# Altium PCB IWatch_DISP.PcbDoc
Units mm, origin at the board's own origin, x right, y up, seen from the top; angles counter-clockwise.
Board outline 35.13 x 30.19 mm, 2 copper layers (Top Layer, Bottom Layer); 25 components, 30 nets, 111 pads, 55 vias.
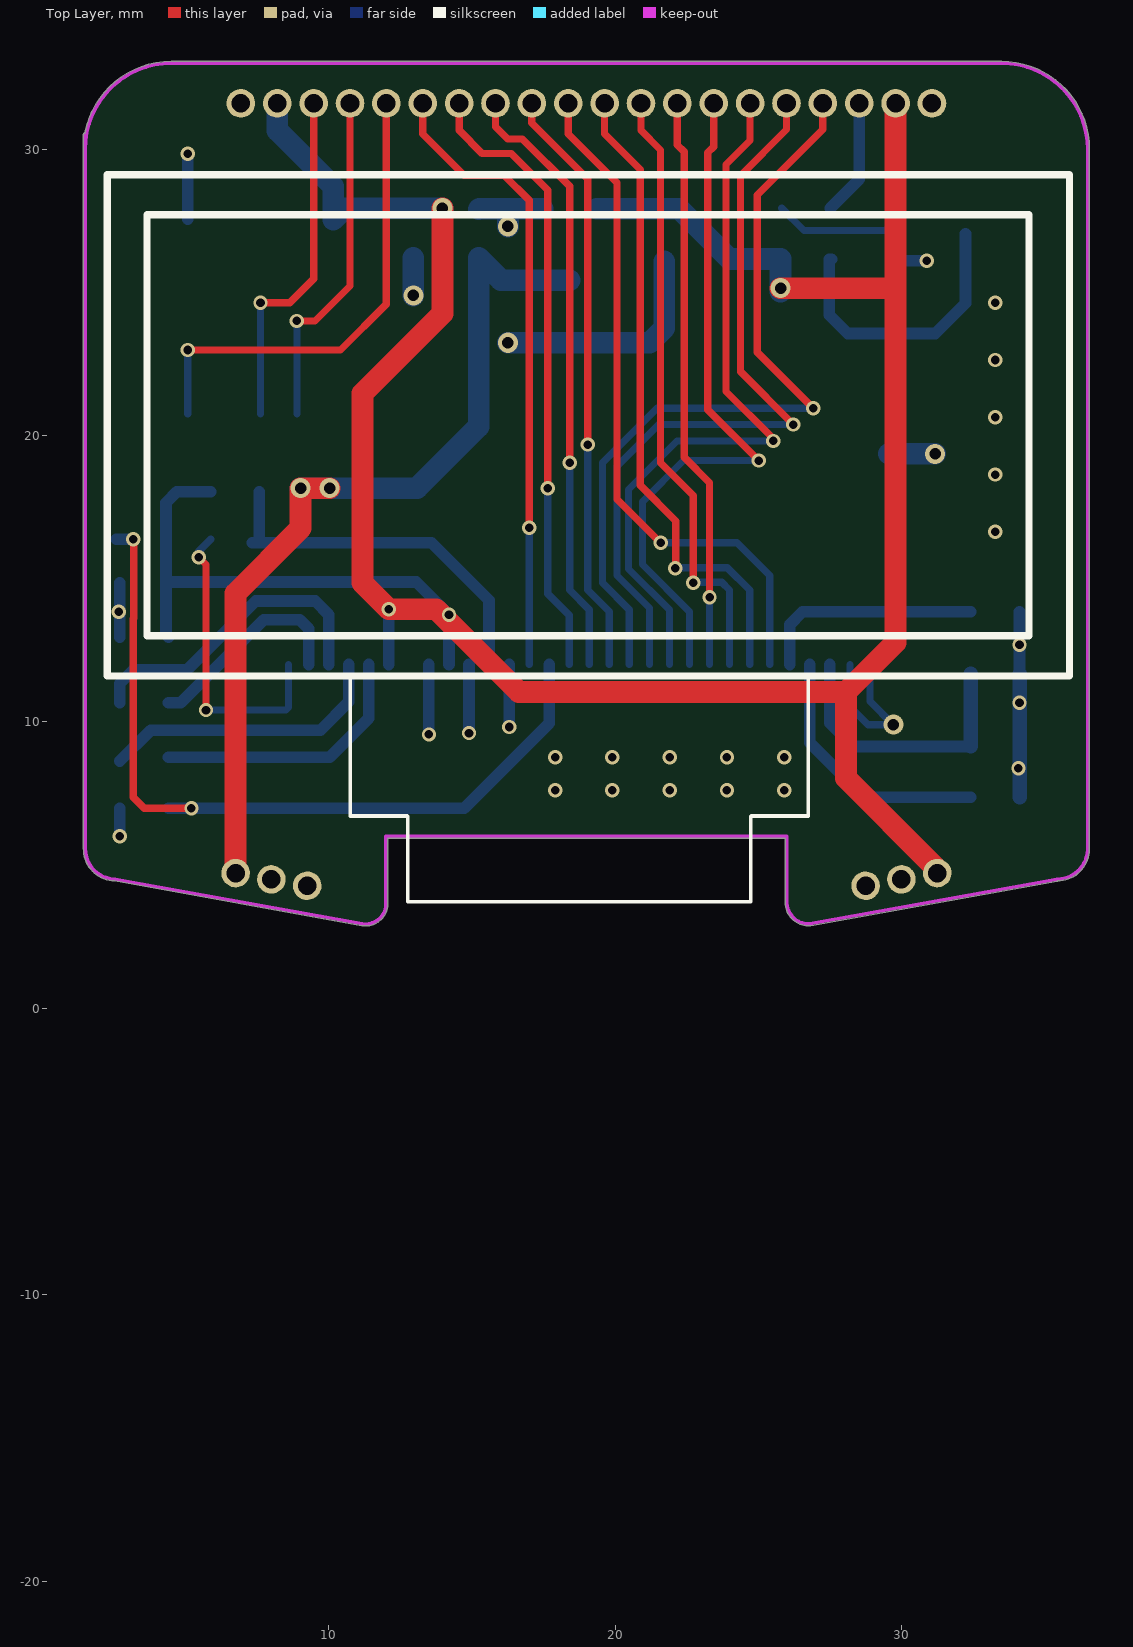
[diagram p0: Top Layer view]
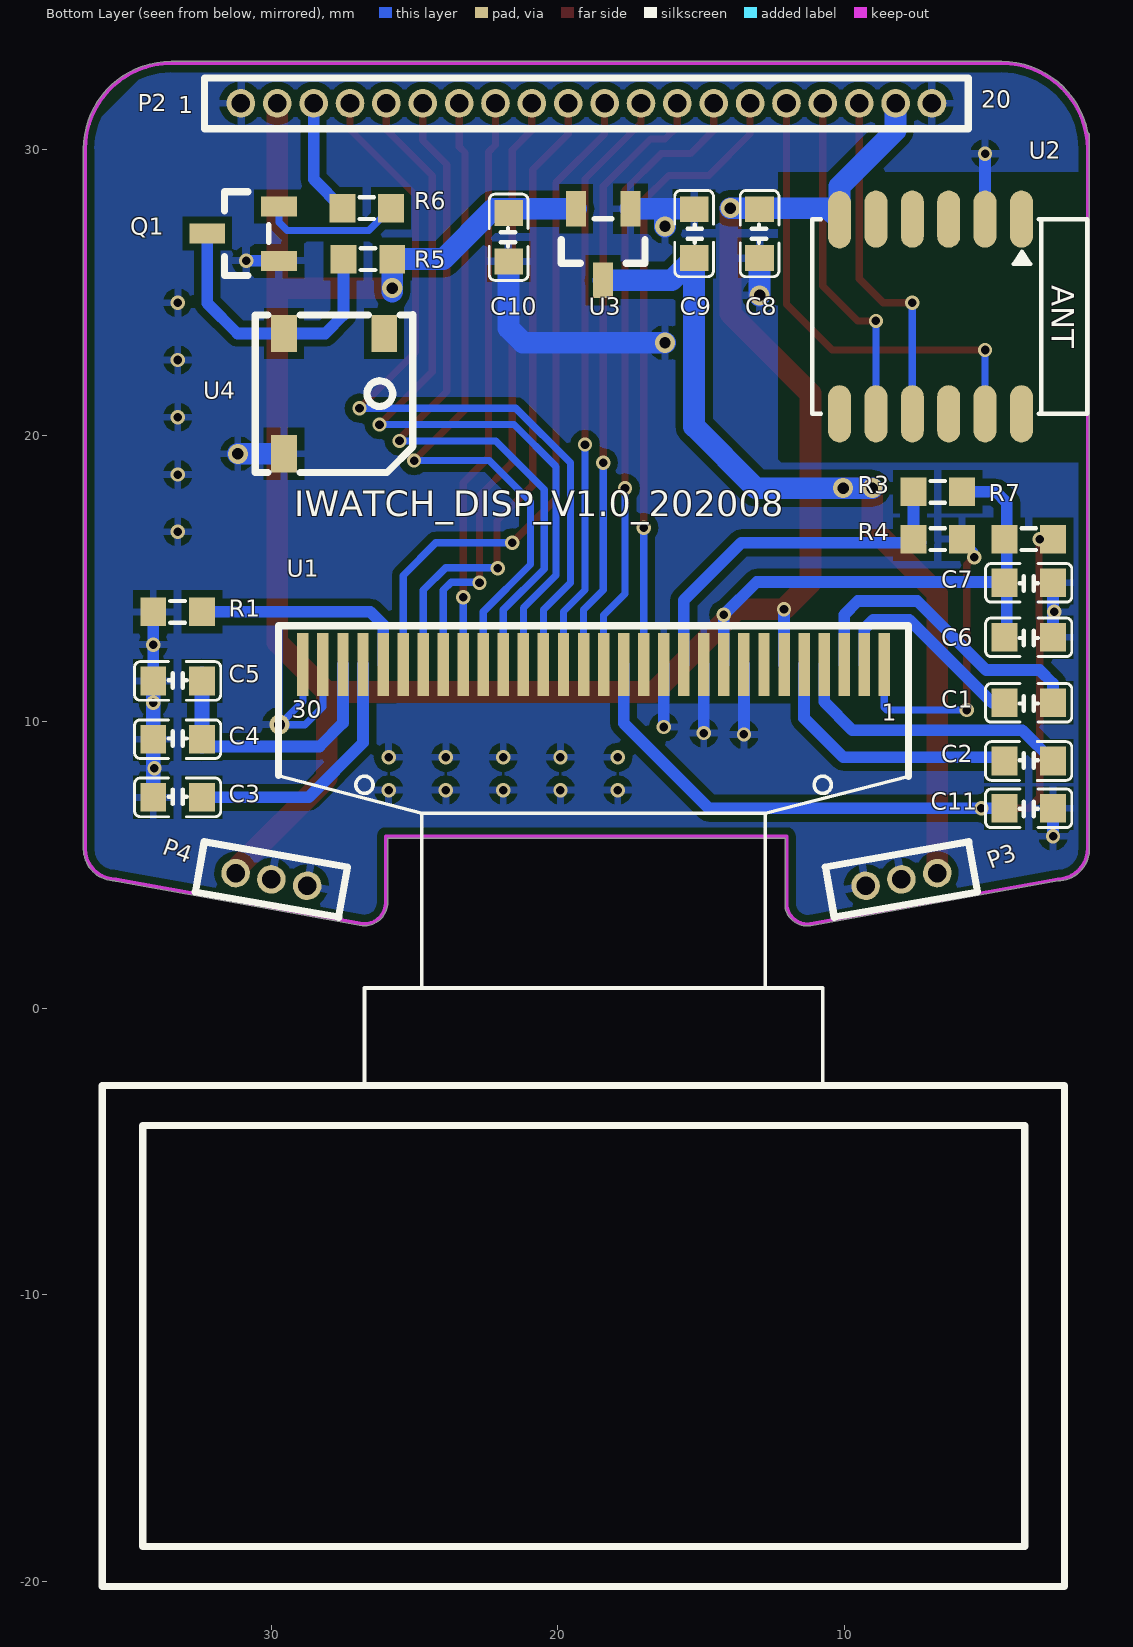
[diagram p1: Bottom Layer view, seen from below]

## Layer stack, top to bottom
Top Solder: solder mask 0.0102, Solder Resist, Dk 3.5
Top Layer: signal copper 0.0356
Dielectric 1: dielectric 0.32, FR-4, Dk 4.8
Bottom Layer: signal copper 0.0356
Bottom Solder: solder mask 0.0102, Solder Resist, Dk 3.5

## Board outline
11.162,2.887 ccw(c11.176,2.949) 11.166,2.886 ccw(c11.285,3.665) 12.063,3.546 ccw(c12,3.556) 12.064,3.556 12.064,5.936 25.936,5.936 25.936,3.683 ccw(c26,3.683) 25.936,3.681 ccw(c26.768,3.712) 26.799,2.88 ccw(c26.797,2.944) 26.83,2.89 35.436,4.443 ccw(c35.425,4.505) 35.453,4.448 ccw(c35.442,5.57) 36.564,5.551 ccw(c36.5,5.552) 36.564,5.552 36.564,30 ccw(c33.5,30) 33.5,33.064 4.5,33.064 ccw(c4.5,30) 1.488,30.563 ccw(c1.5,30.5) 1.436,30.5 1.436,5.589 ccw(c2.558,5.57) 2.534,4.448

## Design rules (kind name [scope] priority, off if disabled: settings)
Clearance [All] p1: gap=0.152 ignorepadtopadclearanceinfootprint=FALSE except(0: Arc-Hole Track-Hole SMDPad-Hole THPad-Hole Via-Hole Fill-Hole Poly-Hole Region-Hole Text-Hole; 0.254: Arc-Poly Arc-Region Track-Poly Track-Region SMDPad-Poly SMDPad-Region THPad-Poly THPad-Region Via-Poly Via-Region Fill-Poly Fill-Region Poly-Poly Poly-Region Region-Region)
MinimumSolderMaskSliver [All] p1 off: minsoldermaskwidth=0.254
NetAntennae [All] p1 off: netantennaetolerance=0
PolygonConnect [All] p1: connectstyle=Relief reliefconductorwidth=0.254 reliefentries=4 polygonreliefangle="90 Angle" airgapwidth=0.254
RoutingVias [All] p1: holewidth=0.711 width=1.27 viastyle="Through Hole" minholewidth=0.711 minwidth=1.27 maxholewidth=0.711 maxwidth=1.27
SilkToSilkClearance [All] p1 off: silktosilkclearance=0.254
SilkToSolderMaskClearance [IsPad] p1 off: minsilkscreentomaskgap=0.254 clearancetoexposedcopper=TRUE
SolderMaskExpansion [All] p1: expansion=0.102
Width [All] p1: maxlimit=1.27 minlimit=0.254 preferedwidth=0.254 minimp=50.000000 maximp=50.000000 favimp=50.000000
26 further rules are at their usual default settings.

## Components (designator, comment, footprint, x,y, rotation, side; value= is the part's Value field where it differs from the comment)
C1 "1uF" C0603 3.556,10.668 r0 bottom
C2 "1uF" C0603 3.556,8.636 r180 bottom
C3 "2.2uF" C0603 33.274,7.366 r180 bottom
C4 "2.2uF" C0603 33.274,9.398 r180 bottom
C5 "1uF" C0603 33.274,11.43 r180 bottom
C6 "2.2uF" C0603 3.556,12.954 r0 bottom
C7 "1uF" C0603 3.556,14.859 r0 bottom
C8 "0.1uF" C0603 12.954,27.051 r90 bottom
C9 "10uF" C0603 15.24,27.051 r270 bottom
C10 "10uF" C0603 21.717,26.924 r90 bottom
C11 "0.1uF" C0603 3.556,6.985 r0 bottom
P2 "Header 20" HDR_1X20P_1.27MM 19,31.6 r180 bottom locked
P3 "Header 3" HDR_1X3P_1.27MM 8,4.5 r170 bottom locked
P4 "Header 3" HDR_1X3P_1.27MM 30,4.5 r10 bottom
Q1 "2N3904" SOT23-3 30.988,27.051 r180 bottom
R1 "560k" R0603 33.274,13.843 r180 bottom
R3 "4.7k" R0603 6.731,18.034 r180 bottom
R4 "4.7k" R0603 6.731,16.383 r0 bottom
R5 "10k" R0603 26.631,26.162 r0 bottom
R6 "10k" R0603 26.67,27.94 r0 bottom
R7 "4.7k" R0603 3.556,16.383 r180 bottom
U1 "OLED 1.3'_30P" "OLED 1.3'_30P" 18.75,9.906 r180 bottom locked
U2 "PW02" PW02 3.81,27.559 r270 bottom
U3 "SC662K-3.2" SOT23-3 18.415,26.67 r90 bottom
U4 "Buzzer" Buzzer_5.5x2.5mm 27.813,21.463 r270 bottom

## Footprints (in the part's own frame and the unit in brackets; to place one, negate y for a bottom-side part, rotate by r counter-clockwise, add the part's x,y. Pads: shape width x height; smd on the part's side, far side on the other; paste and mask are expansions set on the pad)
Buzzer_5.5x2.5mm [mm]
  rect 1.3x0.9 smd: 1(-2.1,-1.75) 2(2.1,-1.75) 3(-2.1,1.75)
  silkscreen extent -2.75,-2.75 2.75,2.75
C0603 [mm]
  rect 0.9x1 smd: 1(-0.85,0) 2(0.85,0)
  silkscreen extent -1.51,-0.67 1.51,0.67, body extent -1.03,-0.51 0.94,0.51, height 0.5
HDR_1X3P_1.27MM [mm]
  round 1 hole 0.65: 1(-1.27,0) 2(0,0) 3(1.27,0)
  silkscreen extent -2.54,-0.89 2.54,0.89
HDR_1X20P_1.27MM [mm]
  round 1 hole 0.65: 1(-12.065,0) 2(-10.795,0) 3(-9.525,0) 4(-8.255,0) 5(-6.985,0) 6(-5.715,0) 7(-4.445,0) 8(-3.175,0) 9(-1.905,0) 10(-0.635,0) 11(0.635,0) 12(1.905,0) 13(3.175,0) 14(4.445,0) 15(5.715,0) 16(6.985,0) 17(8.255,0) 18(9.525,0) 19(10.795,0) 20(12.065,0)
  silkscreen extent -13.33,-0.89 13.33,0.89
"OLED 1.3'_30P" [mm]
  rect 0.4x2.2 smd: 1(10.151,2.101) 2(9.451,2.101) 3(8.75,2.1) 4(8.05,2.1) 5(7.35,2.1) 6(6.65,2.1) 7(5.95,2.1) 8(5.25,2.1) 9(4.55,2.1) 10(3.85,2.1) 11(3.15,2.1) 12(2.45,2.1) 13(1.75,2.1) 14(1.05,2.1) 15(0.349,2.1) 16(-0.35,2.1) 17(-1.05,2.1) 18(-1.75,2.1) 19(-2.451,2.101) 20(-3.15,2.1) 21(-3.851,2.099) 22(-4.55,2.1) 23(-5.249,2.1) 24(-5.95,2.1) 25(-6.65,2.101) 26(-7.35,2.1) 27(-8.051,2.101) 28(-8.75,2.1) 29(-9.451,2.1) 30(-10.15,2.1)
  silkscreen extent -17.16,-30.1 16.44,3.45, body extent -17.21,-6.19 16.39,19.27, height 0.2
PW02 [mm] "BLE"
  oval 2x0.8 smd: 1(0,0) 2(0,-1.27) 3(0,-2.54) 4(0,-3.81) 5(0,-5.08) 6(0.025,-6.35) 7(6.8,-6.35) 8(6.8,-5.08) 9(6.8,-3.81) 10(6.8,-2.54) 11(6.8,-1.27) 12(6.8,0)
  silkscreen extent 0,-7.3 6.8,2.3
R0603 [mm]
  rect 0.9x1 smd: 1(-0.85,0) 2(0.85,0)
  silkscreen extent -0.25,-0.38 0.25,0.38, body extent -1.03,-0.51 0.94,0.51, height 0.5
SOT23-3 [mm]
  rect 1.25x0.7 smd: 1(1.25,-0.95) 2(1.25,0.95) 3(-1.25,0)
  silkscreen extent -0.65,-1.46 0.9,1.46

## Part data
C1 C2 C3 C4 C5 C6 C7 C8 C9 C10 C11: library part C
P2: "Header, 20-Pin", LatestRevisionDate=17-Jul-2002, LatestRevisionNote="Re-released for DXP Platform.", Publisher="Altium Limited"
P3 P4: "Header, 3-Pin", LatestRevisionDate=17-Jul-2002, LatestRevisionNote="Re-released for DXP Platform.", Publisher="Altium Limited"
Q1: "NPN General Purpose Amplifier", ComponentLink1Description="Manufacturer Link", ComponentLink1URL=http://www.fairchildsemi.com/, ComponentLink2Description=Datasheet, ComponentLink2URL=http://www.fairchildsemi.com/ds/2N%2F2N3904.pdf, DatasheetVersion=1997, LatestRevisionDate=15-Jan-2003, LatestRevisionNote="PCB Footprint 'BCY-W3/D4.7' replaced", PackageDescription="TO, Flat Index; 3 In-Line, Axial Leads; Body Dia. 4.5mm; Leads 0.51 x 0.48 mm (max)", PackageReference=TO-92A, PackageVersion=Sep-1998, Published=8-Jun-2000, Publisher="Altium Limited"
R1 R3 R4 R5 R6 R7: library part R
U1: "1.3寸oled显示屏12864 分辨率 驱动芯片ssd1315兼容ssd1306"
U2: "PW02 蓝牙模块 蓝牙5.0 串口透传,DA14585芯片"
U3: "Low Dropout,  250mA"

## Via types
v1: diameter 0.5, hole 0.3, Top Layer to Bottom Layer, tented both sides, 46 vias
v2: diameter 0.7, hole 0.4, Top Layer to Bottom Layer, tented both sides, 9 vias

## Nets (pads, with @x,y where several pads share a name; then routed paths per layer and width w, separated by ;. In a path a pad name is that pad's centre, name@x,y a point inside that pad or via, vN(x,y) a via of type N, cw(c..) or ccw(c..) an arc to the next point about the centre after c; other vN are vias at no path point)
BLE_RX: P2.17 U2.8 | length 12
  Top Layer w0.254: v1(8.89,24.003) 9.525,24.003 10.745,25.223 P2.17
  Bottom Layer w0.254: U2.8 v1(8.89,24.003)
BLE_SLEEP: P2.18 U2.9 | length 12.2
  Top Layer w0.254: v1(7.62,24.638) 8.636,24.638 9.475,25.477 P2.18
  Bottom Layer w0.254: U2.9 v1(7.62,24.638)
BLE_TX: P2.16 U2.11 | length 16.8
  Top Layer w0.254: v1(5.08,22.987) 10.414,22.987 12.015,24.588 P2.16
  Bottom Layer w0.254: U2.11 v1(5.08,22.987)
BS1: R3.1 R4.2 U1.11 | length 13
  Bottom Layer w0.406: R4.2@7.327,16.256 13.589,16.256 15.6,14.245 U1.11 ; R4.2 R3.1
BZR: P2.3 R6.2 | length 4.1
  Bottom Layer w0.406: R6.2 28.525,28.945 P2.3
D0: P2.4 U1.18 | length 28
  Top Layer w0.254: v1(26.924,20.955) 24.969,22.91 24.969,28.398 27.255,30.684 P2.4
  Bottom Layer w0.254: U1.18 20.5,13.917 19.558,14.859 19.558,19.05 21.463,20.955 v1(26.924,20.955)
D1: P2.5 U1.19 | length 26.8
  Top Layer w0.254: P2.5 25.985,30.684 24.384,29.083 24.384,22.225 v1(26.226,20.383)
  Bottom Layer w0.254: U1.19 21.201,13.978 20.066,15.113 20.066,18.923 21.526,20.383 v1(26.226,20.383)
D2: P2.6 U1.20 | length 25.1
  Top Layer w0.254: P2.6 24.715,30.303 23.876,29.464 23.876,21.54 v1@25.477,19.939
  Bottom Layer w0.254: U1.20 21.9,13.914 20.472,15.342 20.472,18.12 22.165,19.812 v1(25.527,19.812)
D3: P2.7 U1.21 | length 24.3
  Top Layer w0.254: P2.7 23.445,30.089 23.241,29.885 23.241,20.905 v1(25.019,19.127)
  Bottom Layer w0.254: U1.21 22.601,13.848 20.955,15.494 20.955,17.69 22.392,19.127 v1(25.019,19.127)
D4: P2.8 U1.22 | length 20.1
  Top Layer w0.254: P2.8 22.175,30.149 22.415,29.909 22.415,19.241 23.3,18.356 v1(23.3,14.351)
  Bottom Layer w0.254: U1.22 v1(23.3,14.351)
D5: P2.9 U1.23 | length 21.5
  Top Layer w0.254: P2.9 20.905,30.657 21.59,29.972 21.59,19.05 22.733,17.907 v1(22.733,14.859)
  Bottom Layer w0.254: v1(22.733,14.859) 22.754,14.88 23.724,14.88 23.999,14.605 U1.23
D6: P2.10 U1.24 | length 22.8
  Top Layer w0.254: P2.10 19.635,30.53 20.877,29.288 20.877,18.26 22.119,17.018 22.119,15.388 v1(22.098,15.367)
  Bottom Layer w0.254: v1(22.098,15.367) 22.119,15.388 23.917,15.388 24.7,14.605 U1.24
D7: P2.11 U1.25 | length 24.1
  Top Layer w0.254: P2.11 18.365,30.53 20.066,28.829 20.066,17.78 v1(21.59,16.256)
  Bottom Layer w0.254: v1(21.59,16.256) 24.257,16.256 25.4,15.113 U1.25
DIS_C1N: C2.1 U1.5 | length 9.4
  Bottom Layer w0.406: C2.1@4.406,8.763 10.033,8.763 11.4,10.13 U1.5
DIS_C1P: C2.2 U1.4 | length 10.2
  Bottom Layer w0.406: C2.2 3.781,9.711 5.045,9.711 5.05,9.716 9.716,9.716 10.7,10.7 U1.4
DIS_C2N: C1.1 U1.3 | length 11.1
  Bottom Layer w0.406: C1.1 2.706,11.342 3.175,11.811 5.041,11.811 7.454,14.224 9.525,14.224 10,13.749 U1.3
DIS_C2P: C1.2 U1.2 | length 7.5
  Bottom Layer w0.406: C1.2 4.832,10.668 7.728,13.564 8.988,13.564 9.299,13.253 U1.2
DIS_CS: P2.15 U1.13 | length 22
  Top Layer w0.254: P2.15 13.285,30.53 14.732,29.083 16.129,29.083 17,28.212 v1(17,16.782)
  Bottom Layer w0.254: U1.13 v1(17,16.782)
DIS_D/C: P2.14 U1.15 | length 21.8
  Top Layer w0.254: P2.14 14.555,30.657 15.367,29.845 16.383,29.845 17.653,28.575 v1(17.653,18.161)
  Bottom Layer w0.254: v1(17.653,18.161) 17.653,14.478 18.401,13.73 U1.15
DIS_RD: P2.12 U1.17 | length 20.7
  Top Layer w0.254: P2.12 17.095,30.911 19.05,28.956 v1(19.05,19.685)
  Bottom Layer w0.254: v1(19.05,19.685) 19.05,14.605 19.8,13.855 U1.17
DIS_RST: C11.2 R7.2 U1.14 | length 28.4
  Top Layer w0.254: v1(3.175,16.383) 3.196,16.362 3.196,13.624 3.175,13.602 3.175,7.366 3.556,6.985 v1(5.207,6.985)
  Bottom Layer w0.406: R7.2@2.579,16.383 R7.2 v1(3.175,16.383) ; C11.2 14.732,6.985 17.7,9.953 U1.14
DIS_WR: P2.13 U1.16 | length 21.2
  Top Layer w0.254: P2.13 15.825,30.784 16.256,30.353 16.764,30.353 18.415,28.702 v1(18.415,19.05)
  Bottom Layer w0.254: v1(18.415,19.05) 18.415,14.605 19.1,13.92 U1.16
GND: C3.1 C4.1 C5.1 C6.1 C7.1 C8.1 C9.1 C10.1 C11.1 P2.1 P2.20 P3.1 P3.2 P4.1 P4.2 Q1.1 R1.1 R4.1 U1.1 U1.8 U1.10 U1.12 U1.29 U1.30 U2.2 U3.1 U4.2 | length 50
  Top Layer w0.254: v1(5.461,15.748) 5.715,15.494 v1(5.715,10.414)
  Bottom Layer w0.254: v1(5.461,15.748) 5.461,15.963 R4.1 ; v1(5.715,10.414) 8.509,10.414 8.599,10.504 U1.1 ; U1.29 28.201,10.534 28.829,9.906 v2(29.718,9.906) 28.9,10.724 U1.30
  Bottom Layer w0.406: v1(2.706,6.008) C11.1 ; C6.1 C7.1 ; U2.2 v1(5.08,29.845) ; v1(13.5,9.563) U1.8 ; v1(14.9,9.611) U1.10 ; v1(16.3,9.823) U1.12 ; Q1.1 v1@30.922,26.101 ; C5.1@34.124,11.684 R1.1
  Bottom Layer w0.508: C3.1 v1(34.124,10.668) C5.1@34.124,11.684
  Bottom Layer w0.762: v2(12.954,24.892) C8.1 ; C9.1 15.259,27.92 16.256,27.92 ; v2(16.256,23.241) 21.209,23.241 21.717,23.749 C10.1 ; v2(16.256,27.305) 16.256,27.92 ; U3.1 16.256,27.92 ; U4.2 v2(31.174,19.363)
  other v1: 17.907,7.62 19.907,7.62 21.907,7.62 23.907,7.62 25.907,7.62 34.085,8.382 17.907,8.763 19.907,8.763 21.907,8.763 23.907,8.763 25.907,8.763 34.124,12.7 2.667,13.843 33.274,16.637 33.274,18.637 33.274,20.637 33.274,22.637 33.274,24.637 30.883,26.101
NetC3_2: C3.2 U1.27 | length 9.2
  Bottom Layer w0.406: U1.27 26.801,9.267 28.702,7.366 C3.2
NetC4_2: C4.2 C5.2 U1.28 | length 9.8
  Bottom Layer w0.406: U1.28 27.5,9.965 28.321,9.144 C4.2@32.424,9.144
  Bottom Layer w0.508: C4.2@32.424,9.144 C5.2@32.424,11.684
NetQ1_2: Q1.2 R6.1 | length 4.9
  Bottom Layer w0.254: R6.1 26.599,27.161 29.447,27.161 29.738,27.452 Q1.2
NetQ1_3: Q1.3 R5.2 U4.1 | length 9.9
  Bottom Layer w0.406: R5.2@27.559,26.162 R5.2 27.481,24.208 28.126,23.563 U4.1 31.183,23.563 32.238,24.618 Q1.3
NetR1_2: R1.2 U1.26 | length 7.9
  Bottom Layer w0.406: U1.26 26.1,13.4 26.543,13.843 R1.2
VBAT: C9.2 P3.3 U3.3 | length 31.9
  Top Layer w0.762: P3.3 6.749,14.496 9.017,16.764 v2(9.017,18.161) v2(10.033,18.161)
  Bottom Layer w0.762: v2(9.017,18.161) v2(10.033,18.161) 13.081,18.161 15.24,20.32 C9.2 16.021,25.42 U3.3
VCC3V3: C6.2 C7.2 C8.2 C10.2 P2.2 P2.19 P4.3 R3.2 R5.1 R7.1 U1.6 U1.9 U2.6 U3.2 | length 103.1
  Top Layer w0.762: v2(13.97,27.94) 13.97,24.257 11.176,21.463 11.176,14.859 v1(12.1,13.935) 13.751,13.935 16.637,11.049 28.067,11.049 ; v2(25.781,25.146) 29.795,25.146 ; P2.2 29.795,25.146 ; P4.3@31.251,4.768 31.135,4.884 31.135,4.97 28.067,8.038 28.067,11.049 ; 28.067,11.049 29.795,12.777 29.795,25.146
  Bottom Layer w0.406: C6.2 4.318,13.042 4.318,17.653 4.699,18.034 R3.2 ; C7.2 4.432,14.885 13.055,14.885 v1(14.2,13.74) U1.9 ; U1.6 v1(12.1,13.935)
  Bottom Layer w0.762: P2.19 8.205,30.657 10.16,28.702 U2.6 10.566,27.94 v2(13.97,27.94) ; U3.2 22.245,27.92 24.003,26.162 R5.1 v2(25.781,25.146) v2@25.781,25.019
pads on no net: U1.7 U2.1 U2.3 U2.4 U2.5 U2.7 U2.10 U2.12 U4.3

## Polygon pours and split planes (outlines as drawn)
GND on Bottom Layer "GND" (solid, remove dead copper, pour order 0): 34.036,33.02 3.556,33.02 1.397,30.861 1.397,4.808 1.506,4.699 1.506,2.685 1.524,2.667 36.449,2.667 36.576,2.794 36.576,30.48

## Keep-outs
Keep-Out Layer:
  lines w0.127: 1.5,30 cw(c4.5,30) 4.5,33 33.5,33 cw(c33.5,30) 36.5,30 36.5,5.552 cw(c35.442,5.57) 35.424,4.512 ; 1.5,30.5 1.5,5.588 ccw(c2.558,5.57) 2.54,4.512 11.176,2.949 ccw(c11.285,3.665) 12,3.556 12,6 26,6 26,3.683 ccw(c26.768,3.712) 26.797,2.944 ; 26.796,2.948 35.425,4.505

## Other copper
Bottom Layer:
  pour cut-out: 1.5,29.21 12.319,29.21 12.319,19.177 12.192,19.05 1.5,19.05
  pour cut-out: 27.94,13.462 29.591,13.462 29.591,9.525 28.067,9.525 27.94,9.652
  pour cut-out: 5.461,13.081 10.033,13.081 10.033,10.16 9.779,9.906 5.461,9.906

## Silkscreen, mask and mechanical layers (free items; w line width, h text height)
Bottom Overlay:
  text "IWATCH_DISP_V1.0_202008" at 29.21,16.891 h1.52
Mechanical 1:
  lines w0.254: 1.488,30.563 cw(c4.5,30) 4.5,33.064 33.5,33.064 cw(c33.5,30) 36.564,30 36.564,5.552 cw(c36.5,5.552) 36.564,5.551 cw(c35.442,5.57) 35.453,4.448 cw(c35.425,4.505) 35.436,4.443 26.83,2.89 cw(c26.797,2.944) 26.799,2.88 cw(c26.768,3.712) 25.936,3.681 cw(c26,3.683) 25.936,3.683 25.936,5.936 12.064,5.936 12.064,3.556 cw(c12,3.556) 12.063,3.546 ; 1.488,30.563 ccw(c1.5,30.5) 1.436,30.5 1.436,5.589 ccw(c2.558,5.57) 2.534,4.448 11.162,2.887 ccw(c11.176,2.949) 11.166,2.886 ; 1.488,30.563 1.488,30.563 ; 11.166,2.886 ccw(c11.285,3.665) 12.063,3.546 ; 11.166,2.886 11.166,2.886 ; 12.063,3.546 12.063,3.546

## Text inside footprints (layer, text, board x,y; h text height)
P2: Bottom Overlay "1" at 33.249,31.041 h1.02; Bottom Overlay "20" at 5.208,31.244 h1.02
U1: Bottom Overlay "1" at 8.692,9.83 h1.02; Bottom Overlay "30" at 29.291,9.931 h1.02
U2: Bottom Overlay "ANT" at 2.743,25.248 h0.79 r90